# EAGLE board SHiB64(Mk.1Mod.2) (EAGLE 9.6.0)
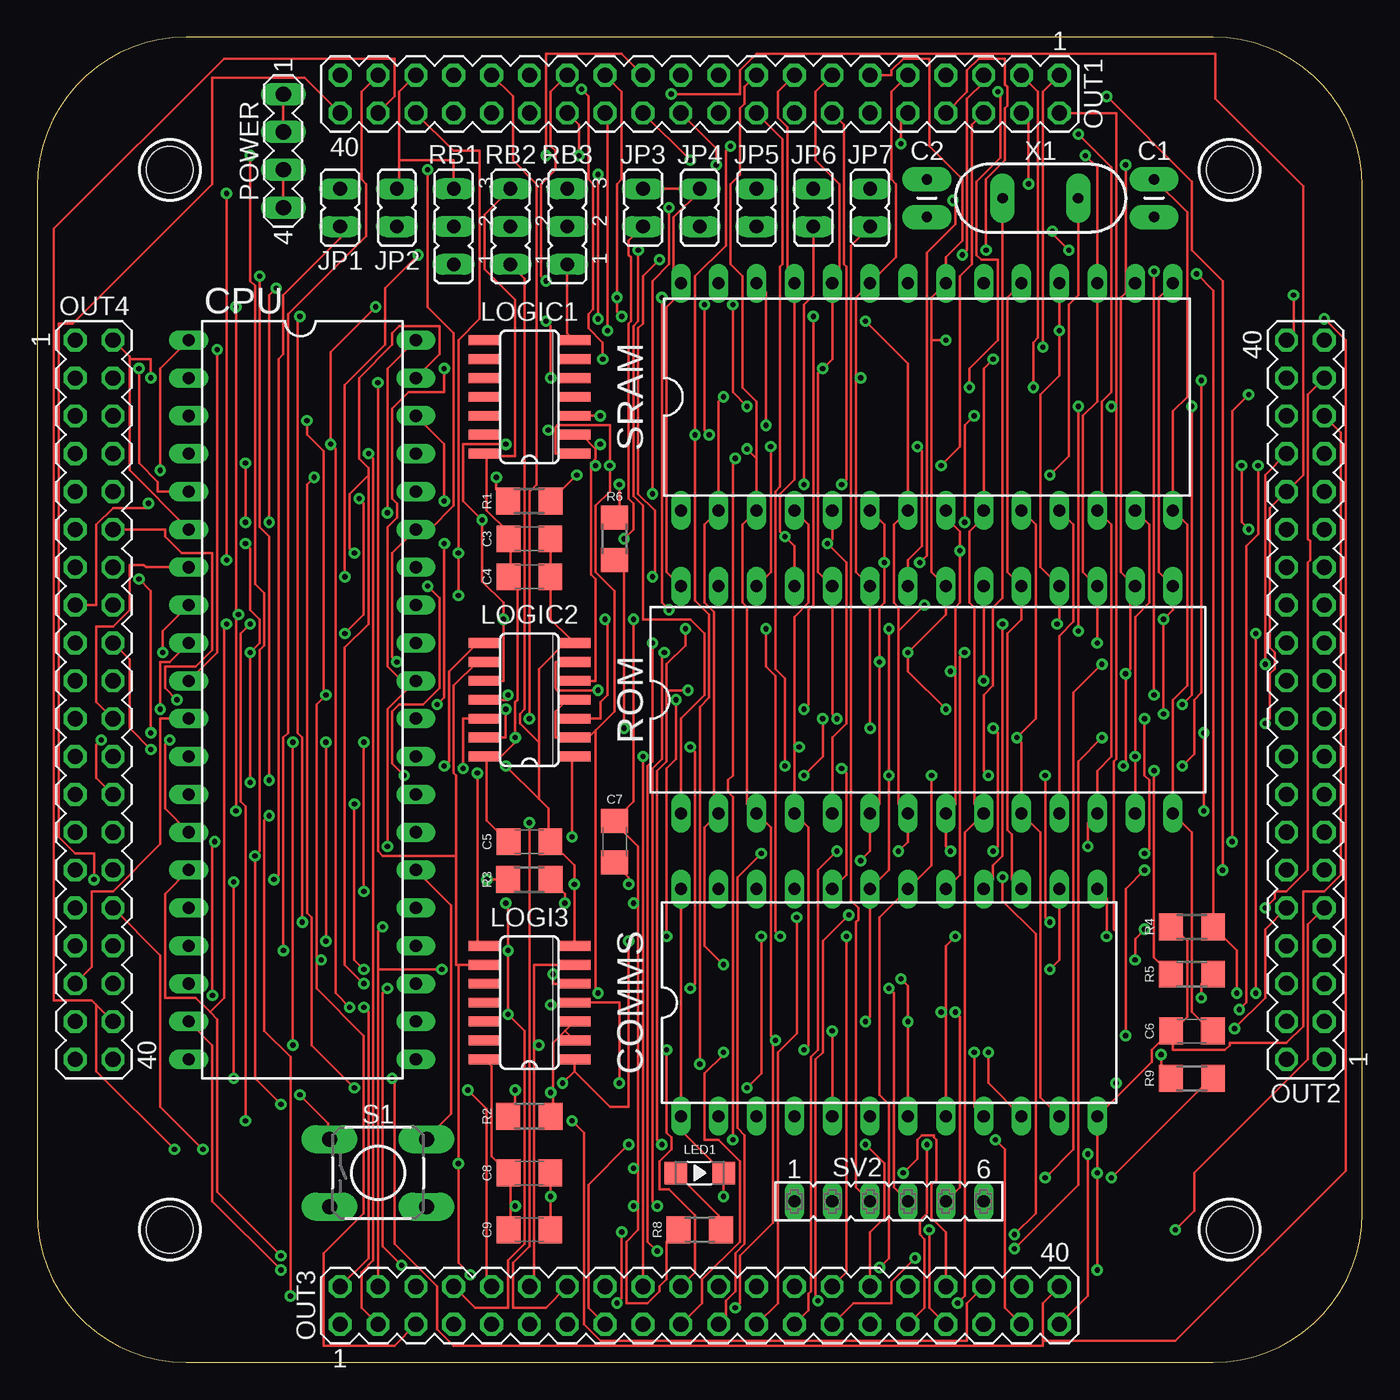
[diagram p0: board, top side]
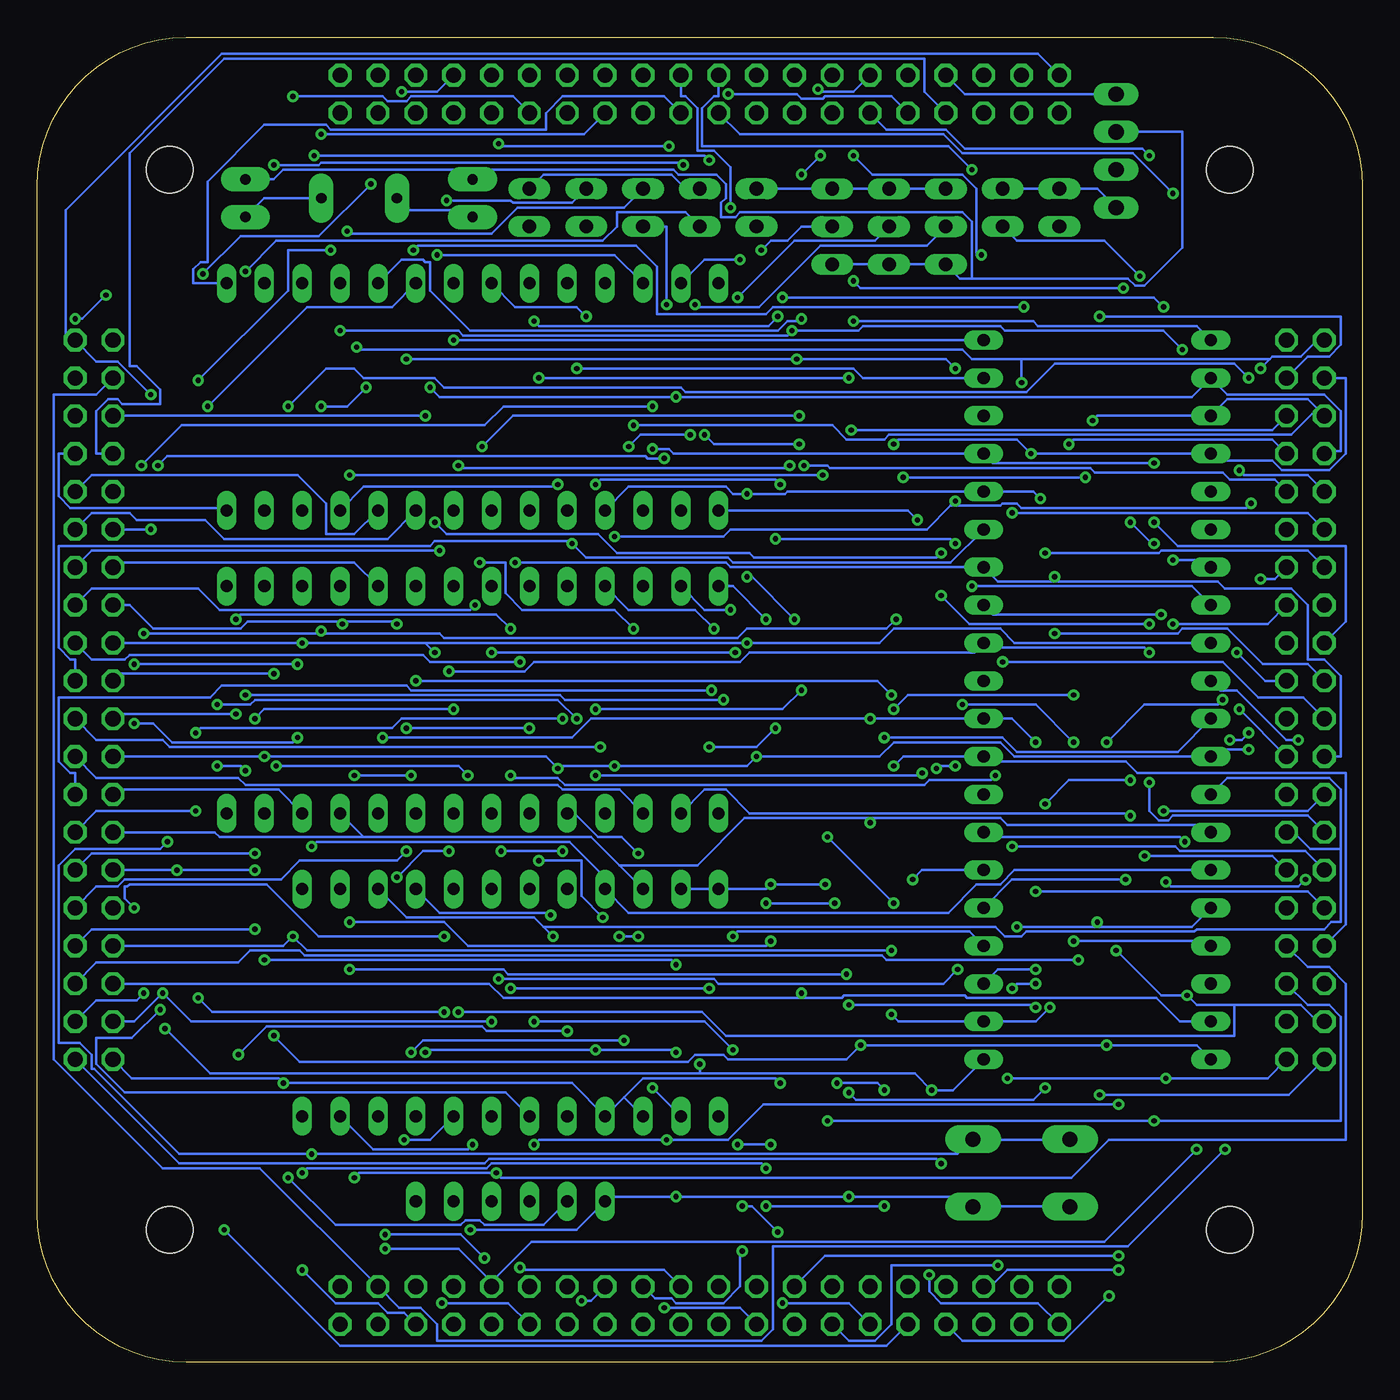
[diagram p1: board, bottom side, seen from below]

Size 88.9 x 88.9 mm. Coordinates in mm from the lower left corner, seen from the top.
Outline: 0,78.9 0,10 arc90 10,0 78.9,0 arc90 88.9,10 88.9,78.9 arc90 78.9,88.9 10,88.9 arc90 0,78.9
Copper layers (1*16): Top 0.035mm / dielectric 1.5mm / Bottom 0.035mm
Design rules "default": minimum track width 6mil, minimum drill 0.35mm, track to track 6mil, track to pad 6mil, pad to pad 6mil, via to via 6mil, smd to smd 6mil, copper to edge 40mil, drill to drill 6mil, minimum pad ring 10mil, minimum via ring 8mil, stop-mask expansion 4mil, vias tented up to drill 0mil, thermal gap 10mil

## Footprints (pad centres in the part's own frame; a part is rotated, then mirrored left to right if it is on the bottom)
CAP-PTH-2.54 = drill 0.7 pad 1.651 long: 1 -1.27,0; 2 1.27,0
C1206 = smd 1.6 x 1.8: 1 -1.4,0; 2 1.4,0
DIL24 = drill 0.813 long: 1 -13.97,-7.62; 2 -11.43,-7.62; 3 -8.89,-7.62; 4 -6.35,-7.62; 5 -3.81,-7.62; 6 -1.27,-7.62; 7 1.27,-7.62; 8 3.81,-7.62; 9 6.35,-7.62; 10 8.89,-7.62; 11 11.43,-7.62; 12 13.97,-7.62; 13 13.97,7.62; 14 11.43,7.62; 15 8.89,7.62; 16 6.35,7.62; 17 3.81,7.62; 18 1.27,7.62; 19 -1.27,7.62; 20 -3.81,7.62; 21 -6.35,7.62; 22 -8.89,7.62; 23 -11.43,7.62; 24 -13.97,7.62
DIL40 = drill 0.813 long: 1 -24.13,-7.62; 2 -21.59,-7.62; 3 -19.05,-7.62; 4 -16.51,-7.62; 5 -13.97,-7.62; 6 -11.43,-7.62; 7 -8.89,-7.62; 8 -6.35,-7.62; 9 -3.81,-7.62; 10 -1.27,-7.62; 11 1.27,-7.62; 12 3.81,-7.62; 13 6.35,-7.62; 14 8.89,-7.62; 15 11.43,-7.62; 16 13.97,-7.62; 17 16.51,-7.62; 18 19.05,-7.62; 19 21.59,-7.62; 20 24.13,-7.62; 21 24.13,7.62; 22 21.59,7.62; 23 19.05,7.62; 24 16.51,7.62; 25 13.97,7.62; 26 11.43,7.62; 27 8.89,7.62; 28 6.35,7.62; 29 3.81,7.62; 30 1.27,7.62; 31 -1.27,7.62; 32 -3.81,7.62; 33 -6.35,7.62; 34 -8.89,7.62; 35 -11.43,7.62; 36 -13.97,7.62; 37 -16.51,7.62; 38 -19.05,7.62; 39 -21.59,7.62; 40 -24.13,7.62
JP1 = drill 0.914 long: 1 0,-1.27; 2 0,1.27
LED_1206 = smd 1.5 x 1.5: + -1.6,0; - 1.6,0
SO14 = smd 0.66 x 2.032: 1 -3.81,-3.073; 2 -2.54,-3.073; 3 -1.27,-3.073; 4 0,-3.073; 5 1.27,-3.073; 6 2.54,-3.073; 7 3.81,-3.073; 8 3.81,3.073; 9 2.54,3.073; 10 1.27,3.073; 11 0,3.073; 12 -1.27,3.073; 13 -2.54,3.073; 14 -3.81,3.073
MA20-2 = drill 1.016 octagon: 1 -24.13,-1.27; 2 -24.13,1.27; 3 -21.59,-1.27; 4 -21.59,1.27; 5 -19.05,-1.27; 6 -19.05,1.27; 7 -16.51,-1.27; 8 -16.51,1.27; 9 -13.97,-1.27; 10 -13.97,1.27; 11 -11.43,-1.27; 12 -11.43,1.27; 13 -8.89,-1.27; 14 -8.89,1.27; 15 -6.35,-1.27; 16 -6.35,1.27; 17 -3.81,-1.27; 18 -3.81,1.27; 19 -1.27,-1.27; 20 -1.27,1.27; 21 1.27,-1.27; 22 1.27,1.27; 23 3.81,-1.27; 24 3.81,1.27; 25 6.35,-1.27; 26 6.35,1.27; 27 8.89,-1.27; 28 8.89,1.27; 29 11.43,-1.27; 30 11.43,1.27; 31 13.97,-1.27; 32 13.97,1.27; 33 16.51,-1.27; 34 16.51,1.27; 35 19.05,-1.27; 36 19.05,1.27; 37 21.59,-1.27; 38 21.59,1.27; 39 24.13,-1.27; 40 24.13,1.27
MA04-1 = drill 1.016 long: 1 -3.81,0; 2 -1.27,0; 3 1.27,0; 4 3.81,0
R1206 = smd 1.6 x 1.803: 1 -1.422,0; 2 1.422,0
JP2 = drill 0.914 long: 1 -2.54,0; 2 0,0; 3 2.54,0
DIL28-6 = drill 0.813 long: 1 -16.51,-7.62; 2 -13.97,-7.62; 3 -11.43,-7.62; 4 -8.89,-7.62; 5 -6.35,-7.62; 6 -3.81,-7.62; 7 -1.27,-7.62; 8 1.27,-7.62; 9 3.81,-7.62; 10 6.35,-7.62; 11 8.89,-7.62; 12 11.43,-7.62; 13 13.97,-7.62; 14 16.51,-7.62; 15 16.51,7.62; 16 13.97,7.62; 17 11.43,7.62; 18 8.89,7.62; 19 6.35,7.62; 20 3.81,7.62; 21 1.27,7.62; 22 -1.27,7.62; 23 -3.81,7.62; 24 -6.35,7.62; 25 -8.89,7.62; 26 -11.43,7.62; 27 -13.97,7.62; 28 -16.51,7.62
TACTILE_SWITCH_PTH_6.0MM = drill 1.016 pad 1.88 long: 1 -3.251,2.261; 2 3.251,2.261; 3 -3.251,-2.261; 4 3.251,-2.261
FE06 = drill 0.813 long: 1 -6.35,0; 2 -3.81,0; 3 -1.27,0; 4 1.27,0; 5 3.81,0; 6 6.35,0
MOUNTINGHOLE_3.2MM_PLATEDTHIN = hole 3.1: 0,0
HC49US = drill 0.7 pad 1.651 long: 1 -2.54,0; 2 2.54,0

## Placement (x,y rotation side)
C1  22pF  [CAP-PTH-2.54]  74.93,78.11 90 top
C2  22pF  [CAP-PTH-2.54]  59.69,78.11 90 top
C3  100nF  [C1206]  33.02,55.24 0 top
C4  100nF  [C1206]  33.02,52.7 0 top
C5  100nF  [C1206]  33.02,34.92 0 top
C6  100nF  [C1206]  77.47,22.23 0 top
C7  100nF  [C1206]  38.73,34.92 270 top
C8  100nF  [C1206]  33.02,12.7 0 top
C9  100uF  [C1206]  33.02,8.89 0 top
COMMS  [DIL24]  57.15,24.13 0 top
CPU  Z80  [DIL40]  17.78,44.45 270 top
JP1  [JP1]  20.32,77.47 0 top
JP2  [JP1]  24.13,77.47 0 top
JP3  [JP1]  40.64,77.47 0 top
JP4  [JP1]  44.45,77.47 0 top
JP5  [JP1]  48.26,77.47 0 top
JP6  [JP1]  52.07,77.47 0 top
JP7  [JP1]  55.88,77.47 0 top
LED1  Red  [LED_1206]  44.45,12.7 0 top
LOGI3  74LS04  [SO14]  33.02,24.13 90 top
LOGIC1  74LS32  [SO14]  33.02,64.77 90 top
LOGIC2  74LS32  [SO14]  33.02,44.45 90 top
OUT1  [MA20-2]  44.45,85.09 180 top
OUT2  [MA20-2]  85.09,44.45 90 top
OUT3  [MA20-2]  44.45,3.81 0 top
OUT4  [MA20-2]  3.81,44.45 270 top
POWER  [MA04-1]  16.51,81.28 270 top
R1  1kΩ  [R1206]  33.02,57.78 0 top
R2  1MΩ  [R1206]  33.02,16.51 0 top
R3  2.2kΩ  [R1206]  33.02,32.38 0 top
R4  1MΩ  [R1206]  77.47,29.21 0 top
R5  1MΩ  [R1206]  77.47,26.04 0 top
R6  1MΩ  [R1206]  38.73,55.24 270 top
R8  330Ω  [R1206]  44.45,8.89 0 top
R9  1MΩ  [R1206]  77.47,19.05 0 top
RB1  [JP2]  27.94,76.2 90 top
RB2  [JP2]  31.75,76.2 90 top
RB3  [JP2]  35.56,76.2 90 top
ROM  27C512AP  [DIL28-6]  59.69,44.45 0 top
S1  [TACTILE_SWITCH_PTH_6.0MM]  22.86,12.7 0 top
SRAM  [DIL28-6]  59.69,64.77 0 top
SV2  [FE06]  57.15,10.79 0 top
U$1  MOUNTING_HOLE  [MOUNTINGHOLE_3.2MM_PLATEDTHIN]  8.89,8.89 0 top
U$2  MOUNTING_HOLE  [MOUNTINGHOLE_3.2MM_PLATEDTHIN]  80.01,8.89 0 top
U$3  MOUNTING_HOLE  [MOUNTINGHOLE_3.2MM_PLATEDTHIN]  80.01,80.01 0 top
U$4  MOUNTING_HOLE  [MOUNTINGHOLE_3.2MM_PLATEDTHIN]  8.89,80.01 0 top
X1  7.3728 MHz  [HC49US]  67.31,78.11 0 top

## Library data of the parts
C1 C2 S1 U$1-U$4 X1 = ACES_THT
C3-C9 LED1 R1-R6 R8 R9 = ACES_SMT
COMMS = micro-motorola; MF: NTE ELECTRONICS; MPN: NTE6850; OC_FARNELL: 4899775; OC_NEWARK: 31C2457
CPU = zilog
JP1-JP7 RB1-RB3 = jumper
LOGI3 LOGIC1 LOGIC2 = 74xx-us
OUT1-OUT4 POWER = con-lstb; OC_FARNELL: unknown; OC_NEWARK: unknown
ROM = microchip; MPN: M27C512-90B6; OC_FARNELL: 1642690; OC_NEWARK: 20M6389
SRAM = memory-hitachi
SV2 = con-lsta; OC_FARNELL: unknown; OC_NEWARK: unknown

## Nets
+5V: C3.1 C4.1 C5.1 C6.1 C7.1 C8.1 C9.1 COMMS.12 CPU.11 JP1.2 JP2.2 JP3.2 JP4.2 JP7.2 LOGI3.14 LOGIC1.14 LOGIC2.14 OUT1.35 OUT2.35 OUT3.35 OUT4.35 POWER.3 POWER.4 R3.2 R4.1 R8.1 RB1.3 RB2.3 RB3.3 ROM.28 SRAM.28
A0: COMMS.11 CPU.30 OUT1.31 OUT2.31 OUT3.31 OUT4.31 ROM.10 SRAM.10
A1: CPU.31 OUT1.29 OUT2.29 OUT3.29 OUT4.29 ROM.9 SRAM.9
A2: CPU.32 OUT1.27 OUT2.27 OUT3.27 OUT4.27 ROM.8 SRAM.8
A3: CPU.33 OUT1.25 OUT2.25 OUT3.25 OUT4.25 ROM.7 SRAM.7
A4: CPU.34 OUT1.23 OUT2.23 OUT3.23 OUT4.23 ROM.6 SRAM.6
A5: CPU.35 OUT1.21 OUT2.21 OUT3.21 OUT4.21 ROM.5 SRAM.5
A6: COMMS.9 CPU.36 OUT1.19 OUT2.19 OUT3.19 OUT4.19 ROM.4 SRAM.4
A7: COMMS.10 CPU.37 OUT1.17 OUT2.17 OUT3.17 OUT4.17 ROM.3 SRAM.3
A8: CPU.38 OUT1.15 OUT2.15 OUT3.15 OUT4.15 ROM.25 SRAM.25
A9: CPU.39 OUT1.13 OUT2.13 OUT3.13 OUT4.13 ROM.24 SRAM.24
A10: CPU.40 OUT1.11 OUT2.11 OUT3.11 OUT4.11 ROM.21 SRAM.21
A11: CPU.1 OUT1.9 OUT2.9 OUT3.9 OUT4.9 ROM.23 SRAM.23
A12: CPU.2 OUT1.7 OUT2.7 OUT3.7 OUT4.7 ROM.2 SRAM.2
A13: CPU.3 LOGIC2.13 OUT1.5 OUT2.5 OUT3.5 OUT4.5 SRAM.26
A14: CPU.4 LOGIC2.10 OUT1.3 OUT2.3 OUT3.3 OUT4.3 SRAM.1
A15: CPU.5 LOGI3.9 LOGIC2.9 OUT1.1 OUT2.1 OUT3.1 OUT4.1
CLK: COMMS.3 COMMS.4 CPU.6 LOGI3.4 OUT1.2 OUT2.2 OUT3.2 OUT4.2
D0: COMMS.22 CPU.14 OUT1.14 OUT2.14 OUT3.14 OUT4.14 ROM.11 SRAM.11
D1: COMMS.21 CPU.15 OUT1.16 OUT2.16 OUT3.16 OUT4.16 ROM.12 SRAM.12
D2: COMMS.20 CPU.12 OUT1.18 OUT2.18 OUT3.18 OUT4.18 ROM.13 SRAM.13
D3: COMMS.19 CPU.8 OUT1.20 OUT2.20 OUT3.20 OUT4.20 ROM.15 SRAM.15
D4: COMMS.18 CPU.7 OUT1.22 OUT2.22 OUT3.22 OUT4.22 ROM.16 SRAM.16
D5: COMMS.17 CPU.9 OUT1.24 OUT2.24 OUT3.24 OUT4.24 ROM.17 SRAM.17
D6: COMMS.16 CPU.10 OUT1.26 OUT2.26 OUT3.26 OUT4.26 ROM.18 SRAM.18
D7: COMMS.15 CPU.13 OUT1.28 OUT2.28 OUT3.28 OUT4.28 ROM.19 SRAM.19
GND: C1.2 C2.2 C3.2 C4.2 C5.2 C6.2 C7.2 C8.2 C9.2 COMMS.1 COMMS.23 COMMS.24 CPU.29 LED1.- LOGI3.7 LOGIC1.7 LOGIC2.7 OUT1.33 OUT2.33 OUT3.33 OUT4.33 POWER.1 POWER.2 RB1.1 RB2.1 RB3.1 ROM.14 S1.3 S1.4 SRAM.14 SV2.1
HALT: CPU.18
INT: COMMS.7 CPU.16 OUT1.4 OUT2.4 OUT3.4 OUT4.4 R4.2
IORQ: CPU.20 LOGI3.6 OUT1.12 OUT2.12 OUT3.12 OUT4.12
M1: COMMS.8 CPU.27 OUT1.37 OUT2.37 OUT3.37 OUT4.37
MREQ: CPU.19 LOGIC1.1 LOGIC2.2 LOGIC2.4 OUT1.6 OUT2.6 OUT3.6 OUT4.6
N$1: C1.1 R1.2 X1.2
N$2: C2.1 LOGI3.1 R2.1 X1.1
N$3: LOGI3.2 LOGI3.3 R1.1 R2.2
N$4: CPU.25 JP1.1
N$5: CPU.23 JP2.1
N$6: CPU.17 JP3.1
N$7: CPU.24 JP4.1
N$8: LOGIC1.3 ROM.22
N$9: LOGIC2.11 ROM.20
N$10: LOGIC2.8 LOGIC2.12
N$11: JP5.2 R5.1
N$12: COMMS.14 LOGI3.5
N$13: JP6.1 R6.1
N$14: COMMS.6 JP5.1
N$15: R6.2 SV2.4
N$16: R5.2 SV2.5
N$17: COMMS.2 JP6.2
N$18: COMMS.5 R9.1
N$19: JP7.1 SV2.3
N$20: R9.2 SV2.2
N$21: LOGI3.8 SRAM.20
N$22: LOGIC2.6 SRAM.22
N$23: LOGIC2.3 SRAM.27
N$26: LED1.+ R8.2
RD: CPU.21 LOGIC1.2 LOGIC2.5 OUT1.10 OUT2.10 OUT3.10 OUT4.10
RESET: CPU.26 OUT1.39 OUT2.39 OUT3.39 OUT4.39 R3.1 S1.1 S1.2
RFSH: CPU.28
RX: OUT1.32 OUT2.32 OUT3.32 OUT4.32
S1: RB1.2 ROM.26
S2: RB2.2 ROM.27
S3: RB3.2 ROM.1
SPR1: OUT1.34 OUT2.34 OUT3.34 OUT4.34
SPR2: OUT1.36 OUT2.36 OUT3.36 OUT4.36
SPR3: OUT1.38 OUT2.38 OUT3.38 OUT4.38
SPR4: OUT1.40 OUT2.40 OUT3.40 OUT4.40
TX: OUT1.30 OUT2.30 OUT3.30 OUT4.30
WR: COMMS.13 CPU.22 LOGIC2.1 OUT1.8 OUT2.8 OUT3.8 OUT4.8

## Tracks (layer width: path | path; a pad name or v marks a point on that pad's centre or on a via)
+5V  (via drill 0.35)
  Top 0.152: 76.2,22.23 77.15,23.18 77.15,28.26 76.2,29.21 R4.1 | v71.12,6.19 v71.12,12.7 COMMS.12 74.77,20.16 74.77,20.95 76.04,22.23 C6.1 76.2,22.23 | OUT2.35 87.47,62.39 87.47,32.7 86.36,31.59 84.93,31.59 84.93,22.54 83.82,21.43 80.01,21.43 80.01,21.27 79.69,20.95 76.2,20.95 76.2,22.23 | 31.75,10.48 31.75,12.7 C8.1 31.59,12.7 30.48,13.81 30.48,19.84 30,20.32 LOGI3.14 | 31.75,10.48 31.75,8.89 C9.1 | v40.01,49.85 40.01,37.62 38.73,36.35 C7.1 38.73,36.2 40.32,34.61 40.32,30.8 | 40.32,30.8 40.32,13.02 | 40.32,13.02 40.32,10.48 | 40.32,10.48 40.32,8.89 39.53,8.1 39.53,3.97 40.96,3.97 41.75,4.76 41.75,5.08 42.23,5.56 42.23,8.1 R8.1 | v35.4,30.8 35.4,31.43 R3.2 | 40.32,30.8 v40.01,30.8 | v32.07,10.48 31.75,10.48 | 40.32,10.48 v40.01,10.48 | CPU.11 8.26,43.18 8.26,34.77 5.08,31.59 3.65,31.59 3.65,26.51 OUT4.35 | 30.16,40.48 30.16,36.35 31.59,34.92 C5.1 | 30.16,40.48 30,40.64 LOGIC2.14 30.16,40.48 | 31.75,52.7 31.75,55.24 C3.1 31.59,55.24 31.59,55.72 30.16,57.15 30.16,60.8 | 30.16,60.8 30,60.96 LOGIC1.14 30.16,60.8 | 30.16,40.48 30.96,40.48 32.07,41.59 v32.07,41.91 32.07,44.29 32.23,44.45 32.23,52.23 31.75,52.7 | 31.75,52.7 C4.1 | POWER.3 POWER.4 | OUT1.35 24.29,85.25 24.29,80.64 | 24.29,80.64 24.29,78.9 JP2.2 | JP3.2 JP4.2 44.45,78.58 42.7,76.83 42.7,72.87 SRAM.28 43.18,71.75 42.23,70.8 42.23,53.02 ROM.28 | 24.29,80.64 27.94,80.64 RB1.3 | 30.16,60.8 32.07,60.8 32.07,71.28 30,73.34 30,76.99 RB2.3 | 40.32,13.02 v40.01,13.02
  Bottom 0.152: OUT3.35 64.29,3.33 65.41,3.33 66.04,3.97 68.9,3.97 v71.12,6.19 | v40.01,49.85 42.23,52.07 ROM.28 | v40.01,30.8 v35.4,30.8 | v40.01,10.48 v32.07,10.48 | JP2.2 JP1.2 17.78,78.74 POWER.4 | RB1.3 RB2.3 RB3.3 JP3.2 | JP7.2 54.93,79.69 46.35,79.69 45.4,78.74 JP4.2 | CPU.11 12.38,40.96 23.18,40.96 24.13,41.91 v32.07,41.91 | v71.12,12.7 70.8,13.02 58.74,13.02 58.42,13.34 40.32,13.34 v40.01,13.02
A0  (via drill 0.35)
  Top 0.152: SRAM.10 66.99,56.2 66.99,43.18 v65.72,41.91 66.04,41.59 ROM.10 67.31,35.56 67.31,17.78 COMMS.11 | v21.91,41.59 v21.91,31.59 | OUT1.31 31.91,84.93 31.91,80.64 33.5,79.06 33.5,58.9 33.02,58.42 v33.02,43.18 | OUT3.31 59.53,3.65 59.53,8.26 59.21,8.57 59.21,9.53 59.69,10 v59.69,14.61
  Bottom 0.152: v65.72,41.91 53.02,41.91 51.75,43.18 v33.02,43.18 CPU.30 23.5,43.18 v21.91,41.59 | OUT4.31 3.65,31.59 v21.91,31.59 | v59.69,14.61 60.01,14.29 66.36,14.29 COMMS.11 | OUT2.31 85.25,59.53 71.44,59.53 69.53,57.63 69.53,55.56 67.63,55.56 SRAM.10
A1  (via drill 0.35)
  Top 0.152: 24.92,45.24 23.5,43.81 v23.5,34.61 | v61.75,3.97 62.23,4.45 62.23,35.56 ROM.9 62.87,37.47 62.87,50.64 62.55,50.96 62.55,55.72 63.5,56.67 SRAM.9 63.5,66.67 v64.14,67.31 | v36.51,85.41 36.99,84.93 36.99,79.38 37.31,79.06 37.31,70.64 36.99,70.33 36.99,69.37 37.94,68.42 v37.94,67.31 | 24.92,45.24 23.5,46.67 23.5,56.04 24.13,56.67 24.13,57.63 23.81,57.94 23.81,63.98 24.92,65.09 27.3,65.09 v27.3,66.67 | 24.92,45.24 CPU.31
  Bottom 0.152: v23.5,34.61 12.54,34.61 12.22,34.29 3.81,34.29 OUT4.29 | OUT3.29 57.31,3.97 v61.75,3.97 | OUT1.29 34.13,85.25 36.35,85.25 v36.51,85.41 | v64.14,67.31 v37.94,67.31 27.94,67.31 v27.3,66.67 | OUT2.29 85.25,56.99 82.71,56.99 82.23,56.52 77.63,56.52 76.36,55.24 65.41,55.24 SRAM.9
A2  (via drill 0.35)
  Top 0.152: 61.59,46.35 61.59,50.64 61.91,50.96 v61.91,54.45 61.91,55.72 60.96,56.67 SRAM.8 | 61.59,46.35 61.59,37.47 ROM.8 60.96,34.61 v61.28,34.29 | 61.59,46.35 v61.28,46.35 | OUT3.27 54.77,3.97 57.31,3.97 57.31,5.4 v58.9,6.99 | v65.56,8.57 66.99,10 66.99,28.73 64.77,30.96 v64.77,32.54 | v14.29,38.89 v14.29,47.62 14.92,48.26 14.92,49.85 14.29,50.48 14.29,54.61 v13.97,54.93 | OUT1.27 34.45,85.25 34.45,81.6 34.77,81.28 34.77,80.01 33.81,79.06 33.81,72.87 v34.13,72.55 | v16.03,72.07 15.56,71.6 v15.56,56.36
  Bottom 0.152: 25.72,47.94 26.04,47.62 41.12,47.62 41.75,46.99 55.56,46.99 56.2,46.35 v61.28,46.35 | v58.9,6.99 60.48,8.57 v65.56,8.57 | v64.77,32.54 63.02,34.29 v61.28,34.29 | OUT4.27 3.65,36.67 12.7,36.67 13.02,36.35 13.65,36.35 14.29,36.99 v14.29,38.89 | v14.29,47.62 14.61,47.94 25.72,47.94 | 25.72,47.94 CPU.32 | OUT2.27 85.25,54.45 v61.91,54.45 | v34.13,72.55 33.66,72.07 v16.03,72.07 | v15.56,56.36 14.13,54.93 v13.97,54.93
A3  (via drill 0.35)
  Top 0.152: v13.34,36.99 13.34,50.01 v13.49,50.16 13.34,50.32 v13.34,70.8 | 57.78,49.05 57.78,50.64 57.47,50.96 57.47,56.2 SRAM.7 58.42,66.99 v55.56,69.85 | 57.78,49.05 57.78,37.47 ROM.7 58.42,34.92 v57.78,34.29 | OUT3.25 51.75,3.49 51.75,4.6 51.91,4.76 51.91,20.48 52.39,20.95 52.39,33.02 v53.66,34.29 | 57.78,49.05 v59.53,50.8 | OUT1.25 39.21,85.25 39.21,79.38 38.89,79.06 v38.89,71.44 38.89,70.48 v39.21,70.17
  Bottom 0.152: CPU.33 24.77,50.16 v13.49,50.16 | v13.34,36.99 3.65,36.99 OUT4.25 | v57.78,34.29 v53.66,34.29 | OUT2.25 85.25,51.91 78.11,51.91 76.68,50.48 59.85,50.48 v59.53,50.8 | v39.21,70.17 39.85,69.53 55.24,69.53 v55.56,69.85 | v13.34,70.8 13.97,71.44 v38.89,71.44
A4  (via drill 0.35)
  Top 0.152: OUT1.23 39.21,87.79 34.13,87.79 v34.13,80.96 | v25.56,74.3 23.34,72.07 23.34,68.26 20.64,65.56 v20.64,52.7 | SRAM.6 56.83,56.2 v56.83,53.66 56.83,50.96 56.52,50.64 v56.52,46.99 56.52,37.47 ROM.6 55.88,34.29 v55.24,33.66 | OUT3.23 49.69,3.97 49.69,20.8 50.96,22.07 v50.96,29.84
  Bottom 0.152: 20.64,52.39 9.68,52.39 9.21,51.91 4.76,51.91 3.65,50.8 3.65,47.15 2.54,47.15 1.43,46.04 1.43,40.64 OUT4.23 | 20.64,52.39 24.45,52.39 CPU.34 42.39,53.34 42.7,53.66 v56.83,53.66 | v34.13,80.96 32.86,79.69 26.83,79.69 25.88,78.74 25.88,74.3 v25.56,74.3 | 20.64,52.39 v20.64,52.7 | v50.96,29.84 52.39,31.27 52.39,33.66 v55.24,33.66 | OUT2.23 85.25,47.15 83.03,47.15 82.71,47.47 63.02,47.47 62.55,46.99 v56.52,46.99
A5  (via drill 0.35)
  Top 0.152: SRAM.5 53.34,55.24 v53.02,54.93 54.29,53.66 54.29,42.86 53.34,41.91 ROM.5 | v24.13,46.99 23.81,47.31 23.81,54.29 CPU.35 26.35,55.88 27.94,57.47 27.94,69.06 26.19,70.8 v26.19,80.01 | OUT3.21 46.2,3.02 46.2,4.13 46.83,4.76 46.83,7.3 47.47,7.94 47.47,15.24 46.99,15.72 46.99,32.54 v48.58,34.13
  Bottom 0.152: CPU.35 27.62,53.66 42.23,53.66 42.55,53.98 52.07,53.98 v53.02,54.93 53.18,55.09 62.23,55.09 62.55,54.77 87.47,54.77 87.47,47.94 86.68,47.15 86.36,47.15 OUT2.21 | OUT4.21 3.97,44.61 6.99,44.61 9.37,46.99 v24.13,46.99 | v48.58,34.13 49.69,35.24 51.28,35.24 52.86,36.83 ROM.5 | OUT1.21 43.18,84.93 43.5,84.93 44.29,84.14 44.29,81.6 27.78,81.6 v26.19,80.01
A6  (via drill 0.35)
  Top 0.152: 50.8,41.27 50.8,50.01 51.75,50.96 51.75,56.2 SRAM.4 | 50.8,41.27 ROM.4 51.75,35.88 51.75,21.27 v51.44,20.95 | COMMS.9 62.87,17.14 v62.87,20.8 | OUT3.19 44.61,3.97 44.61,5.56 47.15,8.1 47.15,13.49 45.72,14.92 44.77,14.92 44.77,19.37 46.04,20.64 v46.04,20.8 | v20.64,48.9 21.91,50.16 21.91,57.63 v21.59,57.94 | 50.8,41.27 v51.12,41.27 | v42.39,77.47 42.39,73.66 41.27,72.55 v41.27,58.26
  Bottom 0.152: v62.87,20.8 62.71,20.95 v51.44,20.95 46.2,20.95 v46.04,20.8 | SRAM.4 49.21,58.74 42.7,58.74 42.23,58.26 v41.27,58.26 38.73,58.26 38.58,58.42 CPU.36 22.07,58.42 v21.59,57.94 | OUT4.19 3.65,46.83 6.67,46.83 9.05,49.21 12.06,49.21 12.38,48.9 v20.64,48.9 | OUT2.19 84.93,41.75 80.49,41.75 80.01,41.27 v51.12,41.27 | OUT1.19 45.72,84.93 45.4,84.93 44.61,84.14 44.61,81.28 43.5,81.28 42.39,80.17 v42.39,77.47
A7  (via drill 0.35)
  Top 0.152: COMMS.10 63.82,18.73 v63.82,20.8 | 49.37,21.75 49.21,21.91 49.21,35.88 ROM.3 47.62,37.47 47.62,50.64 47.31,50.96 47.31,56.2 SRAM.3 48.26,60.64 | 48.26,60.64 v47.62,61.28 | v46.83,3.65 47.15,3.97 47.15,7.14 49.37,9.37 49.37,21.75 | 49.37,21.75 v49.53,21.59 | v13.97,60.33 v13.97,56.36 | OUT1.17 47.47,85.57 47.47,84.45 47.15,84.14 47.15,79.69 46.51,79.06 46.51,73.66 47.31,72.87 47.31,65.41 48.26,64.45 48.26,60.64
  Bottom 0.152: v63.82,20.8 63.02,21.59 v49.53,21.59 | v47.62,61.28 46.51,61.28 46.2,60.96 CPU.37 24.77,60.33 v13.97,60.33 | OUT3.17 41.75,3.65 v46.83,3.65 | OUT4.17 1.11,49.69 1.11,54.77 12.38,54.77 v13.97,56.36 | OUT2.17 84.93,39.21 75.41,39.21 74.93,38.73 53.98,38.73 53.66,38.42 49.85,38.42 ROM.3
A8  (via drill 0.35)
  Top 0.152: OUT1.15 49.69,85.25 49.69,83.5 50.32,82.87 50.32,72.87 SRAM.25 50.8,59.21 49.85,58.26 49.85,55.72 v50.16,55.4 50.8,54.77 ROM.25 | CPU.38 27.3,61.59 v27.3,57.78 | OUT3.15 36.99,3.65 36.99,11.91 v39.69,14.61 | v41.91,14.61 41.59,14.92 41.59,39.69 42.23,40.32 42.23,45.09 | 42.23,45.09 42.23,46.83 43.5,48.1 v43.5,49.21 | OUT4.15 3.97,50.8 3.97,56.2 5.08,57.31 7.46,57.31 v7.46,57.63 | 42.23,45.09 v43.66,45.09
  Bottom 0.152: 27.62,57.47 29.21,55.88 42.39,55.88 42.86,55.4 v50.16,55.4 | 27.62,57.47 v27.3,57.78 | v41.91,14.61 v39.69,14.61 | v43.5,49.21 44.77,50.48 49.21,50.48 ROM.25 | v7.46,57.63 7.78,57.31 22.86,57.31 23.18,57.63 24.13,57.63 24.29,57.47 27.62,57.47 | OUT2.15 86.36,39.53 86.68,39.53 87.47,40.32 87.47,44.61 77.31,44.61 76.52,45.4 64.14,45.4 63.82,45.09 v43.66,45.09
A9  (via drill 0.35)
  Top 0.152: v24.45,6.51 23.18,7.78 23.18,24.77 v23.5,25.08 | v21.91,25.4 20.64,26.67 20.64,47.94 22.23,49.53 22.23,59.53 | 22.23,59.53 22.23,60.01 21.59,60.64 21.59,66.04 23.81,68.26 23.81,69.06 24.29,69.53 26.99,69.53 26.99,67.63 CPU.39 | v21.27,54.29 20.95,54.61 20.95,58.26 22.23,59.53 | OUT1.13 52.23,85.25 52.23,80.64 53.82,79.06 53.82,72.87 SRAM.24 53.34,67.31 v52.7,66.67 52.39,66.36 52.39,53.02 ROM.24 53.34,43.5 v53.66,43.18 | v78.26,42.23 v78.26,36.99
  Bottom 0.152: CPU.39 33.5,66.04 34.13,66.67 v52.7,66.67 | OUT3.13 34.45,1.43 32.7,1.43 31.59,2.54 31.59,6.51 v24.45,6.51 | v23.5,25.08 23.18,25.4 v21.91,25.4 | OUT4.13 3.65,54.45 13.49,54.45 13.65,54.29 v21.27,54.29 | OUT2.13 84.93,36.99 v78.26,36.99 | v78.26,42.23 77.95,42.55 65.09,42.55 64.45,43.18 v53.66,43.18
A10  (via drill 0.35)
  Top 0.152: CPU.40 23.5,66.67 v23.5,56.99 | 60.01,68.58 60.01,71.44 SRAM.21 60.96,74.14 62.07,75.25 62.07,79.38 59.85,81.6 59.85,87.47 58.1,87.47 57.31,86.68 57.31,86.36 OUT1.11 | 60.01,68.58 60.01,53.02 ROM.21 60.96,50.16 v58.42,47.62 58.42,46.35 v60.96,43.81 | v38.89,3.97 39.21,4.29 v39.21,8.73 | v41.59,10.48 41.27,10.79 41.27,39.85 41.91,40.48 41.91,47.47 v42.07,47.62 | v74.3,34.13 74.61,34.45 74.61,39.05 74.3,39.37 v74.3,43.18 | 60.01,68.58 v60.96,68.58
  Bottom 0.152: v23.5,56.99 3.65,56.99 OUT4.11 | OUT3.11 34.45,3.97 v38.89,3.97 | v39.21,8.73 40.96,10.48 v41.59,10.48 | v58.42,47.62 v42.07,47.62 | OUT2.11 85.25,34.13 v74.3,34.13 | v74.3,43.18 73.66,43.81 v60.96,43.81 | v60.96,68.58 CPU.40
A11  (via drill 0.35)
  Top 0.152: v76.36,8.89 77.63,10.16 77.63,12.7 85.25,20.32 85.25,29.37 OUT2.9 | CPU.1 8.26,66.67 v8.26,59.85 | 54.93,66.04 54.93,71.44 SRAM.23 57.63,74.14 57.63,79.06 57.31,79.38 57.31,85.25 OUT1.9 | 54.93,66.04 54.93,53.02 ROM.23 v55.88,42.55 | v34.13,69.85 34.45,69.53 v34.45,66.04 | 54.93,66.04 v55.24,66.04 | v64.14,34.29 64.45,34.61 64.45,42.23 v64.14,42.55
  Bottom 0.152: OUT3.9 31.91,1.11 68.58,1.11 v76.36,8.89 | v8.26,59.85 7.94,59.53 3.65,59.53 OUT4.9 | CPU.1 11.11,69.53 21.75,69.53 22.07,69.85 v34.13,69.85 | v55.24,66.04 v34.45,66.04 | OUT2.9 84.93,31.91 83.5,31.91 83.03,32.38 72.55,32.38 71.28,33.66 64.77,33.66 v64.14,34.29 | v55.88,42.55 v64.14,42.55
A12  (via drill 0.35)
  Top 0.152: v16.99,4.45 16.99,20.48 15.24,22.23 15.24,36.35 v15.56,36.67 | v74.3,29.05 73.66,28.42 v73.66,26.99 | v46.04,26.67 44.77,27.94 44.77,35.88 ROM.2 45.4,37.15 45.4,50.32 44.77,50.96 44.77,56.2 SRAM.2 45.72,64.45 v46.04,64.77 | v64.45,85.25 64.61,85.09 64.61,80.8 63.02,79.22 63.02,74.3 63.34,73.98 64.45,73.98 64.45,68.58 62.55,66.67 v62.55,65.41
  Bottom 0.152: OUT4.7 2.38,61.12 1.43,61.12 1.43,63.82 2.54,64.93 9.05,64.93 CPU.2 11.43,64.77 v46.04,64.77 61.91,64.77 v62.55,65.41 | OUT3.7 26.83,1.43 20,1.43 v16.99,4.45 | v15.56,36.67 15.72,36.83 41.12,36.83 42.7,38.42 44.13,38.42 ROM.2 | OUT2.7 85.25,29.05 v74.3,29.05 | v73.66,26.99 46.35,26.99 v46.04,26.67 | OUT1.7 62.07,85.25 v64.45,85.25
A13  (via drill 0.35)
  Top 0.152: v62.07,74.3 62.39,74.61 62.39,84.77 63.5,85.88 OUT1.5 | LOGIC2.13 31.43,41.91 v31.43,43.81 | v18.1,63.18 18.1,62.23 19.21,61.12 19.21,44.93 v19.37,44.77 18.73,44.13 18.73,26.99 | OUT3.5 23.97,1.11 19.21,1.11 19.21,7.3 21.91,10 21.91,21.91 18.73,25.08 18.73,26.99 | 18.73,26.99 v19.05,26.99 | SRAM.26 48.9,71.75 v48.9,62.87
  Bottom 0.152: SRAM.26 50.16,74.3 v62.07,74.3 | v31.43,43.81 30.48,44.77 v19.37,44.77 | v18.1,63.18 17.78,63.5 CPU.3 9.05,64.61 3.65,64.61 3.02,63.98 | OUT2.5 84.93,26.83 75.41,26.83 74.61,27.62 71.28,27.62 70.96,27.3 32.23,27.3 31.91,26.99 v19.05,26.99 | v48.9,62.87 35.56,62.87 34.61,61.91 32.07,61.91 31.75,62.23 4.76,62.23 3.02,63.98 | 3.02,63.98 OUT4.5
A14  (via drill 0.35)
  Top 0.152: OUT3.3 21.75,3.65 21.75,6.03 22.54,6.83 22.54,60.64 v22.23,60.96 | LOGIC2.10 31.27,45.72 v31.27,49.85 31.27,50.96 29.84,52.39 v29.84,56.52 28.57,57.78 28.57,61.59 v31.43,61.59 | v81.76,48.9 v81.76,24.77 | OUT1.3 67.15,85.25 67.15,68.74 66.83,68.42 v66.83,65.41 | v69.85,49.05 v69.85,64.14
  Bottom 0.152: OUT4.3 1.11,66.04 1.11,60.96 2.22,59.85 5.4,59.85 6.03,60.48 9.68,60.48 CPU.4 v22.23,60.96 23.18,61.91 31.11,61.91 v31.43,61.59 | v29.84,56.52 30.48,57.15 SRAM.1 | OUT2.3 84.93,24.29 82.23,24.29 v81.76,24.77 | 69.85,48.9 61.91,48.9 61.59,48.58 41.91,48.58 41.27,49.21 31.91,49.21 v31.27,49.85 | 69.85,48.9 v81.76,48.9 | v66.83,65.41 68.1,64.14 v69.85,64.14 | 69.85,48.9 v69.85,49.05
A15  (via drill 0.35)
  Top 0.152: CPU.5 8.1,58.42 8.1,59.05 6.83,60.33 v6.83,66.67 | OUT1.1 67.47,85.25 v67.47,68.1 | 28.26,26.67 28.1,26.67 28.1,33.97 | 28.26,26.67 LOGI3.9 | 28.1,33.97 28.1,39.37 27.94,39.53 27.94,45.4 29.53,46.99 LOGIC2.9 | v29.05,5.87 28.26,6.67 v28.26,13.34 28.26,26.67 | v22.86,65.72 22.86,34.29 23.18,33.97 28.1,33.97
  Bottom 0.152: 6.19,67.31 6.03,67.47 4.13,67.47 3.02,68.58 OUT4.1 | 6.19,67.31 v6.83,66.67 | v67.47,68.1 67.31,67.94 26.83,67.94 26.19,67.31 22.86,67.31 | 6.19,67.31 22.86,67.31 | OUT3.1 21.75,3.97 28.26,3.97 29.05,4.76 v29.05,5.87 | OUT2.1 79.38,13.34 58.9,13.34 58.58,13.65 28.57,13.65 v28.26,13.34 | v22.86,65.72 22.86,67.31
CLK  (via drill 0.35)
  Top 0.152: v39.05,18.73 39.05,24.13 LOGI3.4 36.04,24.13 36.04,23.97 v34.45,23.97 | OUT3.2 22.23,6.99 22.23,23.5 v21.91,23.81 | CPU.6 6.19,59.85 6.19,67.31 | 6.19,67.31 6.19,67.47 OUT4.2 | OUT1.2 72.39,83.82 72.39,64.14 | 72.39,64.14 72.39,40.48 72.23,40.32 72.23,29.05 72.39,28.89 v72.39,18.73 | 6.19,67.31 7.62,67.31 v7.62,66.04 | 72.39,64.14 v72.07,64.14
  Bottom 0.152: v39.05,18.73 39.37,19.05 48.26,19.05 49.53,17.78 | 49.53,17.78 COMMS.4 53.02,18.73 v72.39,18.73 72.71,19.05 82.55,19.05 OUT2.2 | 49.53,17.78 COMMS.3 | v21.91,23.81 22.07,23.97 v34.45,23.97 | v7.62,66.04 8.57,66.99 20.64,66.99 22.54,65.09 45.4,65.09 45.72,65.41 61.59,65.41 62.23,66.04 66.99,66.04 67.63,66.67 69.53,66.67 v72.07,64.14
D0  (via drill 0.35)
  Top 0.152: SRAM.11 69.53,56.2 69.53,49.69 68.58,48.74 ROM.11 | OUT3.14 34.13,3.65 31.91,3.65 31.91,6.67 33.02,7.78 v33.02,36.2 | v6.83,52.55 7.62,51.75 v7.62,42.23 | v8.89,41.75 8.57,41.43 8.57,37.15 CPU.14 | OUT1.14 54.13,83.03 54.13,73.66 54.29,73.5 54.29,59.21 v53.98,58.9
  Bottom 0.152: 49.85,33.34 51.75,35.24 66.99,35.24 | 49.85,33.34 COMMS.22 | ROM.11 66.99,35.24 | CPU.14 10.64,36.04 23.81,36.04 24.29,36.51 33.02,36.51 | 33.02,36.51 41.43,36.51 44.61,33.34 49.85,33.34 | 33.02,36.51 v33.02,36.2 | OUT2.14 76.99,35.56 76.68,35.24 66.99,35.24 | OUT4.14 5.87,52.55 v6.83,52.55 | v7.62,42.23 8.1,41.75 v8.89,41.75 | v53.98,58.9 54.13,58.74 66.99,58.74 SRAM.11
D1  (via drill 0.35)
  Top 0.152: 71.44,56.83 72.07,56.2 72.07,40.64 71.12,39.69 ROM.12 70.48,36.2 v70.48,34.61 | v69.85,82.39 72.07,80.17 72.07,65.09 71.44,64.45 71.44,56.83 | 71.44,56.83 SRAM.12 | v16.35,7.14 12.06,11.43 12.06,23.02 11.59,23.5 | 11.59,23.5 10.64,24.45 8.57,24.45 8.57,31.43 CPU.15 | v12.7,49.53 12.54,49.37 12.54,24.45 11.59,23.5
  Bottom 0.152: ROM.12 72.71,38.42 83.5,38.42 OUT2.16 | OUT1.16 52.23,82.39 v69.85,82.39 | CPU.15 23.34,33.02 24.29,32.07 25.88,32.07 27.78,30.16 49.21,30.16 COMMS.21 50.8,32.54 53.18,34.92 70.17,34.92 v70.48,34.61 | OUT3.16 36.04,7.14 v16.35,7.14 | OUT4.16 6.35,49.53 v12.7,49.53
D2  (via drill 0.35)
  Top 0.152: ROM.13 v73.66,40.64 73.66,50.01 74.61,50.96 74.61,56.2 SRAM.13 | v7.62,41.12 6.19,42.55 6.19,47.15 OUT4.18 | COMMS.20 54.29,32.7 54.29,39.53 v53.98,39.85 | v40.64,40.64 OUT3.18 | OUT1.18 50.01,82.07 50.01,73.66 49.85,73.5 49.85,58.74 49.53,58.42 49.53,46.51 50.16,45.88 v50.16,40.01
  Bottom 0.152: v7.62,41.12 9.68,41.12 CPU.12 23.34,40.64 24.29,41.59 31.43,41.59 32.38,40.64 v40.64,40.64 41.27,40.01 v50.16,40.01 54.13,40.01 | 54.13,40.01 54.77,40.64 v73.66,40.64 OUT2.18 | 54.13,40.01 v53.98,39.85
D3  (via drill 0.35)
  Top 0.152: CPU.8 8.41,49.05 v8.41,47.62 | v57.15,49.21 v57.15,39.37 57.15,33.02 COMMS.19 55.88,23.18 v55.56,22.86 | SRAM.15 75.25,71.44 75.25,53.02 ROM.15 76.2,50.48 v75.56,49.85 v75.56,43.5 | OUT3.20 44.13,6.03 44.13,9.84 42.39,11.59 41.75,11.59 41.75,13.49 42.55,14.29 42.55,15.08 42.23,15.4 v42.23,20.95 | v26.19,52.07 26.99,51.28 26.99,45.24 25.88,44.13 24.29,44.13 23.81,43.66 23.81,40.16 v24.61,39.37
  Bottom 0.152: v8.41,47.62 6.51,45.72 OUT4.20 | v57.15,49.21 58.1,50.16 75.25,50.16 v75.56,49.85 | v42.23,20.95 44.13,22.86 v55.56,22.86 | OUT2.20 83.5,43.5 v75.56,43.5 | OUT1.20 46.83,84.93 53.66,84.93 54.77,83.82 54.77,82.71 69.22,82.71 69.53,83.03 73.66,83.03 77.47,79.22 77.47,73.82 77.95,73.82 78.42,73.34 78.42,72.39 SRAM.15 | CPU.8 11.43,52.07 v26.19,52.07 | v24.61,39.37 24.92,39.05 29.05,39.05 29.37,38.73 53.5,38.73 53.98,39.21 56.99,39.21 v57.15,39.37
D4  (via drill 0.35)
  Top 0.152: v56.52,6.35 57.15,6.99 57.15,17.3 56.52,17.94 56.52,29.84 COMMS.18 60.01,33.34 v60.01,39.37 | CPU.7 7.3,53.34 7.14,53.5 6.19,53.5 6.19,50.48 5.08,49.37 3.97,49.37 3.97,44.29 OUT4.22 | 73.34,52.39 72.71,53.02 72.71,71.44 73.03,71.75 | OUT1.22 45.56,81.44 v45.56,80.33 | 73.03,71.75 v73.03,80.33 | 73.03,71.75 SRAM.16 | 73.34,52.39 73.34,46.51 v73.03,46.2 73.03,40.16 v72.87,40.01 | 73.34,52.39 ROM.16 | v12.7,78.42 v12.7,53.82
  Bottom 0.152: v56.52,6.35 56.36,6.19 46.83,6.19 OUT3.22 | v45.56,80.33 45.72,80.49 69.85,80.49 70.01,80.33 v73.03,80.33 | OUT2.22 83.34,46.2 v73.03,46.2 | CPU.7 10.64,53.82 v12.7,53.82 | v12.7,78.42 15.4,81.12 26.83,81.12 28.1,82.39 41.75,82.39 OUT1.22 | v60.01,39.37 60.64,40.01 v72.87,40.01
D5  (via drill 0.35)
  Top 0.152: v43.81,80.64 OUT1.24 | v70.33,80.96 71.12,80.17 SRAM.17 71.12,64.45 70.17,63.5 70.17,53.02 ROM.17 v71.12,48.26 | CPU.9 8.89,46.99 8.26,46.99 v8.26,43.81 | COMMS.17 61.91,32.7 61.91,47.31 v62.23,47.62 | v41.59,7.46 40.96,8.1 40.96,40.01 41.27,40.32 v41.27,48.26
  Bottom 0.152: v43.81,80.64 44.13,80.96 v70.33,80.96 | OUT4.24 v8.26,43.81 | 62.87,48.26 v62.23,47.62 | OUT2.24 v71.12,48.26 62.87,48.26 | OUT3.24 47.47,4.29 46.35,4.29 46.04,3.97 42.86,3.97 41.75,5.08 41.75,7.46 v41.59,7.46 | 62.87,48.26 v41.27,48.26 32.38,48.26 31.43,49.21 24.29,49.21 23.34,48.26 CPU.9
D6  (via drill 0.35)
  Top 0.152: COMMS.16 64.14,32.38 64.14,33.34 64.77,33.97 v64.77,49.53 | v52.39,4.13 52.23,4.29 52.23,20.32 52.7,20.8 52.7,28.26 v54.45,30 | v4.29,41.75 3.97,41.43 3.97,39.21 OUT4.26 | SRAM.18 v68.58,69.22 68.58,66.2 67.31,64.93 67.31,53.34 ROM.18 68.58,49.69 v68.42,49.53 | OUT1.26 38.26,83.66 v38.26,69.22 | CPU.10 12.06,47.62 v12.06,67.94
  Bottom 0.152: v64.77,49.53 64.93,49.69 68.42,49.69 | 68.42,49.69 74.77,49.69 75.25,49.21 81.12,49.21 82.71,50.8 OUT2.26 | OUT3.26 51.75,4.13 v52.39,4.13 | v54.45,30 54.61,30.16 61.91,30.16 COMMS.16 | CPU.10 9.53,45.09 8.41,45.09 5.08,41.75 v4.29,41.75 | v68.58,69.22 60.64,69.22 60.33,68.9 38.58,68.9 v38.26,69.22 33.81,69.22 33.5,69.53 24.29,69.53 23.97,69.22 13.34,69.22 v12.06,67.94 | v68.42,49.53 68.42,49.69
D7  (via drill 0.35)
  Top 0.152: COMMS.15 65.41,32.38 65.41,35.4 65.09,35.72 65.09,48.9 66.04,49.85 ROM.19 65.09,53.02 65.09,71.44 SRAM.19 | OUT3.28 54.29,6.03 v54.29,28.57 | OUT1.28 36.35,83.03 v36.35,80.96 | v37.62,70.01 v37.62,79.69
  Bottom 0.152: CPU.13 9.05,39.21 2.22,39.21 1.43,38.42 1.43,34.45 | 1.43,34.45 3.49,34.45 4.6,35.56 OUT4.28 | 54.93,29.21 55.56,29.84 64.14,29.84 COMMS.15 | 54.93,29.21 v54.29,28.57 | v37.62,79.69 v36.35,80.96 | v37.62,70.01 37.78,69.85 38.58,69.85 39.21,69.22 59.85,69.22 62.55,71.91 62.55,73.82 62.87,73.82 63.02,73.98 64.45,73.98 SRAM.19 | OUT2.28 83.5,53.66 67.63,53.66 ROM.19 | 1.43,34.45 1.43,29.53 2.06,29.53 2.54,29.05 11.11,29.05 11.27,28.89 22.54,28.89 22.86,28.57 23.97,28.57 24.61,29.21 54.93,29.21
GND  (via drill 0.35)
  Top 0.152: C6.2 78.74,22.23 77.47,23.5 77.47,35.56 ROM.14 76.2,44.45 77.15,45.4 77.15,56.2 SRAM.14 76.2,63.82 77.15,64.77 77.15,77.15 C1.2 | 46.04,12.7 43.18,15.56 COMMS.1 COMMS.24 | v39.69,32.07 39.69,32.54 38.73,33.5 C7.2 | C9.2 34.45,8.89 v34.45,11.11 34.45,12.7 C8.2 | OUT3.33 59.85,3.65 v59.85,8.89 | v46.04,11.11 46.04,12.7 | 46.04,12.7 LED1.- | RB3.1 35.56,69.06 36.04,68.58 LOGIC1.7 | POWER.1 POWER.2 | 34.45,52.7 34.45,55.24 C3.2 | 35.72,48.58 34.45,49.85 34.45,52.7 | 35.72,48.58 36.04,48.26 LOGIC2.7 35.72,48.58 | 34.45,52.7 C4.2 | LOGI3.7 36.04,27.94 v36.04,32.07 36.04,33.34 34.45,34.92 C5.2 34.29,34.92 34.29,37.15 33.66,37.78 | 33.66,37.78 v31.43,40.01 | 35.72,48.58 33.66,46.51 33.66,41.59 | 33.66,37.78 33.66,41.59 | RB2.1 32.7,72.71 32.7,43.81 32.38,43.5 32.38,42.86 33.66,41.59
  Bottom 0.152: C1.2 73.03,79.38 72.39,80.01 60.33,80.01 C2.2 59.05,80.01 46.2,80.01 45.88,79.69 43.34,79.69 42.7,79.06 42.7,78.11 43.02,77.79 43.02,76.83 42.07,76.83 41.75,77.15 26.83,77.15 26.19,76.52 26.19,72.71 | SRAM.14 76.36,57.31 86.68,57.31 87.47,58.1 87.47,60.96 OUT2.33 | COMMS.23 COMMS.24 40.01,31.75 v39.69,32.07 v36.04,32.07 | v59.85,8.89 52.7,8.89 SV2.1 50.48,11.11 v46.04,11.11 v34.45,11.11 26.83,11.11 26.19,10.48 S1.4 26.04,10.48 19.68,10.48 S1.3 | RB3.1 RB2.1 RB1.1 26.99,72.71 26.19,72.71 | OUT1.33 26.67,85.09 POWER.1 | 26.19,72.71 15.72,72.71 15.24,72.23 14.61,72.23 12.06,74.77 12.06,82.55 POWER.2 | v31.43,40.01 30.8,40.64 CPU.29 25.08,40.32 15.88,40.32 15.08,39.53 1.11,39.53 1.11,29.37 OUT4.33
INT  (via drill 0.35)
  Top 0.152: v23.18,29.21 22.86,28.89 22.86,26.35 | OUT3.4 22.86,26.35 | v17.62,70.17 17.46,70.01 17.46,42.23 17.78,41.91 v17.78,29.53 | R4.2 80.49,27.62 v80.49,24.77 | COMMS.7 v58.42,22.86 58.42,25.24 v57.94,25.72 | OUT1.4 66.52,83.34 v66.52,79.06 | v77.79,73.03 78.9,71.91 R4.2 | R4.2 | v27.15,26.35 22.86,26.35
  Bottom 0.152: CPU.16 11.43,29.21 17.78,29.21 | v23.18,29.21 17.78,29.21 | OUT4.4 3.65,67.47 2.22,67.47 1.43,68.26 1.43,70.17 v17.62,70.17 | 17.78,29.21 v17.78,29.53 | OUT2.4 82.39,22.86 v80.49,24.77 78.58,22.86 v58.42,22.86 | v66.52,79.06 70.01,75.56 75.25,75.56 v77.79,73.03 | v27.15,26.35 28.1,25.4 43.18,25.4 43.5,25.72 v57.94,25.72
IORQ  (via drill 0.35)
  Top 0.152: LOGI3.6 33.34,26.67 33.34,21.27 | 33.34,21.27 33.34,5.4 OUT3.12 | 33.34,21.27 v33.66,21.27 | OUT4.12 8.57,55.88 8.57,55.4 9.68,54.29 11.75,54.29 11.75,47.78 10.64,46.67 8.57,46.67 8.57,45.24 v9.37,44.45 | v17.14,21.27 v17.14,41.59 | v74.3,33.02 73.03,31.75 v73.03,21.91 | v71.75,84.93 77.47,79.22 77.47,74.61 79.53,72.55 v79.53,33.02
  Bottom 0.152: CPU.20 11.11,21.27 v17.14,21.27 v33.66,21.27 34.61,20.32 42.55,20.32 42.86,20.64 44.77,20.64 45.24,20.16 71.28,20.16 v73.03,21.91 | v9.37,44.45 9.68,44.13 14.61,44.13 v17.14,41.59 | v74.3,33.02 v79.53,33.02 OUT2.12 | OUT1.12 56.99,84.93 63.82,84.93 64.14,84.61 65.41,84.61 65.72,84.93 v71.75,84.93
M1  (via drill 0.35)
  Top 0.152: v11.91,34.92 11.75,34.77 v11.75,24.61 | OUT1.37 21.75,85.25 21.75,79.38 22.07,79.06 22.07,75.56 16.83,70.33 16.83,42.23 16.51,41.91 v16.51,27.62 | v64.29,14.92 64.93,14.29 64.93,3.65 OUT3.37 | OUT2.37 85.25,64.93 85.25,55.24 85.41,55.09 85.41,53.82 85.25,53.66 85.25,33.02 83.82,31.59 83.03,31.59 83.03,31.11 v82.39,30.48 | v61.59,28.57 60.96,27.94 60.96,23.5 | COMMS.8 60.96,23.5 | 60.96,23.5 v60.64,23.5
  Bottom 0.152: CPU.27 25.08,35.24 12.22,35.24 v11.91,34.92 | 8.57,23.97 4.13,23.97 3.02,22.86 OUT4.37 | 8.57,23.97 11.11,23.97 v11.75,24.61 13.49,24.61 v16.51,27.62 | COMMS.8 62.55,14.92 v64.29,14.92 | v82.39,30.48 83.03,31.11 83.03,31.91 82.87,31.91 82.71,32.07 73.5,32.07 70.01,28.57 v61.59,28.57 | 8.57,23.97 8.57,21.91 42.7,21.91 44.29,23.5 v60.64,23.5
MREQ  (via drill 0.35)
  Top 0.152: CPU.19 11.75,21.27 11.75,10.79 v16.35,6.19 | LOGIC2.4 35.56,44.45 34.77,43.66 34.77,41.91 LOGIC2.2 36.99,41.91 37.47,42.39 | LOGIC1.1 34.77,60.96 34.77,62.55 | 34.77,62.55 34.77,62.71 34.92,62.87 38.42,62.87 v38.42,60.17 38.42,58.42 37.47,57.47 37.47,53.02 38.73,51.75 38.73,43.66 37.47,42.39 | 34.77,62.55 v34.29,62.55 | OUT1.6 62.71,83.03 62.71,73.66 61.91,72.87 61.91,61.44 v60.64,60.17 | v37.62,24.77 37.47,24.92 37.47,42.39
  Bottom 0.152: v16.35,6.19 23.81,6.19 24.92,5.08 OUT3.6 | OUT2.6 58.58,25.4 57.63,24.45 37.62,24.45 | 37.62,24.45 34.92,24.45 34.77,24.61 26.67,24.61 26.51,24.45 13.81,24.45 12.22,22.86 CPU.19 | OUT4.6 6.03,62.55 v34.29,62.55 | v60.64,60.17 60.48,60.01 38.58,60.01 v38.42,60.17 | v37.62,24.77 37.62,24.45
N$1  (via drill 0.35)
  Top 0.152: v36.2,59.53 R1.2 | v67.94,59.53 69.22,60.8 69.22,70.96 69.85,71.6 X1.2
  Bottom 0.152: v67.94,59.53 v36.2,59.53 | C1.1 73.66,78.11 X1.2
N$2  (via drill 0.35)
  Top 0.152: v32.07,18.26 32.07,16.83 31.75,16.51 R2.1 | 36.04,19.53 v35.24,18.73 | 36.04,19.53 36.04,20.32 LOGI3.1 | 36.04,19.53 38.42,17.14 39.69,17.14 v39.69,28.26 | v67.94,29.53 67.63,29.84 v67.63,39.37 | v63.82,39.37 63.5,39.69 63.5,44.77 64.14,45.4 64.14,50.64 64.77,51.28 X1.1
  Bottom 0.152: v32.07,18.26 32.54,18.73 v35.24,18.73 | C2.1 60.17,77.31 63.98,77.31 X1.1 | v39.69,28.26 40.01,27.94 60.01,27.94 61.59,29.53 v67.94,29.53 | v63.82,39.37 v67.63,39.37
N$3  (via drill 0.35)
  Top 0.152: 34.61,18.1 34.61,21.43 35.4,22.23 | 34.61,18.1 34.61,16.67 R2.2 | 35.4,22.23 36.04,22.86 LOGI3.3 | v30.8,59.37 30.8,58.58 R1.1 | v18.57,59.37 18.1,58.9 18.1,30.16 18.41,29.84 18.41,21.27 v21.27,18.41 | 34.61,18.1 v34.45,18.1 | 35.4,22.23 36.04,21.59 LOGI3.2
  Bottom 0.152: v18.57,59.37 v30.8,59.37 | v21.27,18.41 22.07,17.62 33.97,17.62 v34.45,18.1
N$4  (via drill 0.35)
  Top 0.152: v15.88,32.38 16.19,32.7 16.19,67.31 16.51,67.63 16.51,71.6 20.32,75.41 JP1.1
  Bottom 0.152: CPU.25 23.5,32.38 v15.88,32.38
N$5  (via drill 0.35)
  Top 0.152: v21.91,26.35 21.27,26.99 v21.27,37.47 | v15.56,39.05 15.56,55.4 14.92,56.04 v14.92,72.87
  Bottom 0.152: CPU.23 24.45,26.35 v21.91,26.35 | v21.27,37.47 19.68,39.05 v15.56,39.05 | v14.92,72.87 17.3,75.25 23.18,75.25 JP2.1
N$6  (via drill 0.35)
  Top 0.152: v19.37,41.59 v19.37,28.26 | v26.83,44.13 27.3,44.61 v27.3,54.93 | v39.37,55.24 40.01,55.88 40.01,57.63 39.69,57.94 39.69,69.69 39.85,69.85 39.85,74.14 39.69,74.3 39.69,75.25 JP3.1
  Bottom 0.152: CPU.17 10.48,28.26 v19.37,28.26 | v19.37,41.59 21.91,44.13 v26.83,44.13 | v27.3,54.93 27.62,55.24 v39.37,55.24
N$7  (via drill 0.35)
  Top 0.152: v42.23,28.57 42.23,39.85 42.86,40.48 v42.86,44.45 | v74.93,73.18 v74.93,44.77
  Bottom 0.152: CPU.24 26.35,28.89 41.91,28.89 v42.23,28.57 | v42.86,44.45 53.5,44.45 53.82,44.77 v74.93,44.77 | v74.93,73.18 72.87,75.25 50.96,75.25 50.01,76.2 50.01,77.15 45.4,77.15 JP4.1
N$8  (via drill 0.35)
  Top 0.152: v37.78,63.5 LOGIC1.3 | v59.05,61.44 59.37,61.12 59.37,54.77 58.42,53.82 ROM.22
  Bottom 0.152: v37.78,63.5 56.99,63.5 v59.05,61.44
N$9  (via drill 0.35)
  Top 0.152: LOGIC2.11 31.59,44.45 v31.59,44.77 | ROM.20 v63.5,45.72
  Bottom 0.152: v31.59,44.77 32.54,45.72 v63.5,45.72
N$10  (via drill 0.35)
  Top 0.152: LOGIC2.12 28.57,43.18 v28.57,39.85 | v27.3,40.01 27.62,40.32 27.62,46.35 29.53,48.26 LOGIC2.8
  Bottom 0.152: v28.57,39.85 28.42,40.01 v27.3,40.01
N$11  (via drill 0.35)
  Top 0.152: v74.93,39.69 74.93,27.15 R5.1 | v76.83,40.01 77.63,40.8 77.63,44.45 78.11,44.93 v78.11,65.88 | v69.22,74.61 68.1,75.72 v68.1,75.88
  Bottom 0.152: v74.93,39.69 75.25,40.01 v76.83,40.01 | v78.11,65.88 72.07,71.91 72.07,74.61 v69.22,74.61 | v68.1,75.88 67.94,75.72 58.42,75.72 56.67,77.47 49.53,77.47 JP5.2
N$12  (via drill 0.35)
  Top 0.152: LOGI3.5 34.61,25.4 v34.61,26.04 | v67.94,26.35 68.58,26.99 COMMS.14
  Bottom 0.152: v34.61,26.04 57.31,26.04 57.63,26.35 v67.94,26.35
N$13  (via drill 0.35)
  Top 0.152: v39.05,58.9 39.05,56.99 R6.1 | v51.44,58.9 51.44,70.96 52.07,71.6 JP6.1
  Bottom 0.152: v39.05,58.9 39.37,59.21 51.12,59.21 v51.44,58.9
N$14  (via drill 0.35)
  Top 0.152: v80.64,23.65 81.12,24.13 81.12,54.77 81.92,55.56 v81.92,60.17 | v47.62,64.14 46.67,65.09 v46.67,70.96
  Bottom 0.152: COMMS.6 57.47,18.1 83.03,18.1 84.93,20 84.93,21.75 82.55,21.75 v80.64,23.65 | v81.92,60.17 79.22,62.87 58.9,62.87 57.63,64.14 v47.62,64.14 | v46.67,70.96 46.67,76.2 JP5.1
N$15  (via drill 0.35)
  Top 0.152: v39.37,42.55 39.37,53.18 R6.2 | v43.81,41.27 44.13,40.96 44.13,25.4 v43.81,25.08 | v57.15,25.08 57.47,24.77 57.47,11.75 SV2.4
  Bottom 0.152: v39.37,42.55 40.64,41.27 v43.81,41.27 | v57.15,25.08 v43.81,25.08
N$16  (via drill 0.35)
  Top 0.152: v78.11,24.45 78.11,25.4 78.74,26.04 R5.2 | v61.59,23.5 61.91,23.18 61.91,11.75 SV2.5
  Bottom 0.152: v78.11,24.45 77.15,23.5 v61.59,23.5
N$17  (via drill 0.35)
  Top 0.152: v47.62,18.41 48.58,19.37 v48.58,28.57 | v49.85,28.57 49.53,28.89 49.53,46.04 48.9,46.67 v48.9,49.21 | v59.21,53.66 59.69,54.13 59.69,74.45 61.59,76.36 61.59,77.79 v61.44,77.95
  Bottom 0.152: v47.62,18.41 COMMS.2 | v49.85,28.57 v48.58,28.57 | v48.9,49.21 50.16,50.48 56.36,50.48 57.47,51.59 57.47,53.66 v59.21,53.66 | v61.44,77.95 57.15,77.95 56.99,77.79 53.02,77.79 JP6.2
N$18  (via drill 0.35)
  Top 0.152: v75.41,20.64 75.41,19.68 R9.1 | COMMS.5 v53.34,22.23
  Bottom 0.152: v75.41,20.64 73.5,22.54 59.05,22.54 58.74,22.23 v53.34,22.23
N$19
  Top 0.152: SV2.3 54.93,11.75 54.93,29.53 55.09,29.69 55.09,30.48 54.61,30.96 54.61,74.93 JP7.1
N$20  (via drill 0.35)
  Top 0.152: v72.07,12.38 78.74,19.05 R9.2
  Bottom 0.152: v72.07,12.38 68.9,9.21 60.48,9.21 60.17,9.53 59.21,9.53 58.9,9.21 54.93,9.21 SV2.2
N$21  (via drill 0.35)
  Top 0.152: v29.53,39.53 29.53,28.26 29.84,27.94 LOGI3.8 | v51.44,39.37 52.7,40.64 v52.7,43.18 | v76.83,44.13 77.47,44.77 v77.47,64.14
  Bottom 0.152: v29.53,39.53 29.69,39.37 v51.44,39.37 | v52.7,43.18 53.98,44.45 74.3,44.45 74.61,44.13 v76.83,44.13 | v77.47,64.14 70.8,70.8 65.09,70.8 SRAM.20
N$22  (via drill 0.35)
  Top 0.152: LOGIC2.6 34.77,46.99 34.77,45.24 34.92,45.09 v37.62,45.09 | v51.44,43.81 51.75,44.13 51.75,50.48 52.07,50.8 v52.07,70.17
  Bottom 0.152: v37.62,45.09 38.89,43.81 v51.44,43.81 | v52.07,70.17 52.7,70.8 56.83,70.8 SRAM.22
N$23  (via drill 0.35)
  Top 0.152: LOGIC2.3 37.78,43.18 37.78,44.29 38.26,44.77 38.26,49.69 v38.1,49.85 | v41.27,52.7 41.43,52.86 41.43,57.15 40.32,58.26 40.32,69.37 40.64,69.69 40.64,72.87 v41.75,73.98
  Bottom 0.152: v38.1,49.85 40.96,52.7 v41.27,52.7 | v41.75,73.98 44.13,73.98 SRAM.27
N$26
  Top 0.152: LED1.+ 42.86,12.7 45.72,9.84 45.72,8.89 R8.2
RD  (via drill 0.35)
  Top 0.152: v28.89,18.26 30.16,16.99 30.16,5.4 OUT3.10 | OUT2.10 82.39,29.05 82.39,24.45 v80.33,22.38 | LOGIC2.5 37.47,45.72 37.47,52.55 37.15,52.86 37.15,60.17 | 37.15,60.17 37.15,60.33 37.47,60.64 37.47,61.28 | 37.47,61.28 36.51,62.23 LOGIC1.2 | 37.15,60.17 v37.47,60.17 | OUT1.10 57.94,83.34 v57.94,81.76 | v46.51,81.6 46.2,81.28 46.2,74.93 44.13,72.87 v44.13,62.23 44.13,51.12 45.09,50.16 45.09,44.61 44.45,43.97 v44.45,20 | 37.47,61.28 v37.78,61.59
  Bottom 0.152: CPU.21 27.46,18.26 v28.89,18.26 30,19.37 44.45,19.37 | v80.33,22.38 77.31,19.37 44.45,19.37 | OUT4.10 5.87,59.21 8.89,59.21 9.37,59.69 17.94,59.69 18.26,60.01 35.72,60.01 35.88,60.17 v37.47,60.17 | v57.94,81.76 57.78,81.6 v46.51,81.6 | v44.13,62.23 43.5,61.59 v37.78,61.59 | v44.45,20 44.45,19.37
RESET  (via drill 0.35)
  Top 0.152: v17.62,17.94 19.53,16.03 19.53,15.08 S1.1 | v30.16,32.38 R3.1 | OUT3.39 70.48,4.45 v70.48,13.97 | CPU.26 27.78,30.64 27.78,16.67 26.19,15.08 S1.2 | v81.28,64.93 80.17,63.82 v80.17,34.92
  Bottom 0.152: OUT1.39 21.75,87.79 76.52,87.79 87,77.31 87,68.58 OUT2.39 84.93,67.15 83.5,67.15 v81.28,64.93 | OUT4.39 4.92,17.94 v17.62,17.94 | v30.16,32.38 29.53,33.02 CPU.26 | S1.1 19.68,14.92 26.04,14.92 S1.2 26.19,14.92 27.15,13.97 v70.48,13.97 79.38,13.97 85.09,19.68 85.25,19.68 85.25,20.64 86.04,21.43 87.47,21.43 87.47,33.34 86.36,34.45 80.64,34.45 v80.17,34.92
RX  (via drill 0.35)
  Top 0.152: OUT4.32 8.26,27.3 8.26,17.14 v11.11,14.29 | v42.55,85.09 47.15,85.09 47.15,86.68 48.26,87.79 79.06,87.79 79.06,84.77 84.93,78.9 84.93,59.53 OUT2.32 82.71,57.31 82.71,47.94 83.03,47.62 83.03,46.51 82.71,46.2 82.71,43.18 v82.39,42.86 | v65.56,7.62 69.85,11.91 69.85,40.32 v71.44,41.91
  Bottom 0.152: v11.11,14.29 17.3,8.1 55.72,8.1 58.42,5.4 | OUT1.32 31.59,84.93 36.04,84.93 36.2,84.77 37.62,84.77 37.94,85.09 v42.55,85.09 | 58.42,5.4 60.64,7.62 v65.56,7.62 | v71.44,41.91 71.75,41.59 79.85,41.59 81.12,42.86 v82.39,42.86 | 58.42,5.4 OUT3.32
S1  (via drill 0.35)
  Top 0.152: ROM.26 49.21,53.02 v49.21,61.44 | v45.09,62.23 44.77,62.55 v44.77,70.96
  Bottom 0.152: v49.21,61.44 48.42,62.23 v45.09,62.23 | v44.77,70.96 44.61,70.8 40.48,70.8 36.35,74.93 29.21,74.93 RB1.2
S2  (via drill 0.35)
  Top 0.152: v42.39,50.48 41.91,50.96 v41.91,71.44
  Bottom 0.152: ROM.27 44.13,50.48 v42.39,50.48 | v41.91,71.44 38.1,75.25 32.7,75.25 RB2.2
S3  (via drill 0.35)
  Top 0.152: ROM.1 43.18,43.18 44.77,44.77 44.77,48.9 43.81,49.85 40.64,49.85 40.64,57.47 40.01,58.1 40.01,69.53 40.32,69.85 v40.32,74.61
  Bottom 0.152: v40.32,74.61 39.69,75.25 38.58,75.25 37.62,76.2 RB3.2
SPR1  (via drill 0.35)
  Top 0.152: v58.1,12.7 59.05,13.65 59.05,14.92 59.37,15.24 60.17,15.24 60.17,15.08 60.33,14.92 60.33,12.22 60.01,11.91 60.01,9.68 60.96,8.73 OUT3.34 | OUT2.34 82.39,59.53 v82.39,46.83 | v71.44,46.83 69.53,44.93 69.53,14.29 v67.63,12.38
  Bottom 0.152: OUT1.34 29.37,85.25 29.37,87.47 76.36,87.47 82.71,81.12 82.71,66.83 82.23,66.83 80.64,65.25 80.64,64.29 83.19,64.29 83.5,64.61 84.14,64.61 84.93,63.82 84.93,60.96 OUT2.34 | OUT4.34 3.65,26.51 2.22,26.51 1.11,25.4 1.11,14.92 16.99,14.92 19.53,12.38 57.78,12.38 v58.1,12.7 67.31,12.7 v67.63,12.38 | v71.44,46.83 v82.39,46.83
SPR2  (via drill 0.35)
  Top 0.152: v35.88,16.19 36.67,15.4 36.67,2.54 37.78,1.43 62.39,1.43 62.39,3.97 OUT3.36 | OUT1.36 27.94,81.28 29.69,81.28 29.69,70.01 28.26,68.58 v28.26,54.29 v28.26,51.44 | v14.29,49.53 13.65,48.9 13.65,37.62 13.97,37.31 v13.97,16.19 | v62.87,63.5 62.23,62.87 v62.23,56.36
  Bottom 0.152: OUT4.36 3.65,23.97 2.22,23.97 1.43,23.18 1.43,16.19 v13.97,16.19 v35.88,16.19 | v28.26,51.44 26.35,49.53 v14.29,49.53 | v62.87,63.5 OUT2.36 | v62.23,56.36 61.44,55.56 51.28,55.56 50.01,54.29 41.12,54.29 40.8,53.98 28.57,53.98 v28.26,54.29
SPR3  (via drill 0.35)
  Top 0.152: 3.97,23.97 3.65,24.29 1.11,24.29 1.11,76.04 12.54,87.47 23.97,87.47 23.97,84.93 OUT1.38 | 3.97,23.97 OUT4.38 | v9.21,14.29 3.97,19.53 3.97,23.97
  Bottom 0.152: OUT2.38 84.93,64.93 87.79,64.93 87.79,20.32 80.49,13.02 73.98,13.02 OUT3.38 64.61,3.65 63.18,3.65 62.07,2.54 62.07,1.43 40.32,1.43 39.53,2.22 39.53,7.78 15.72,7.78 v9.21,14.29
SPR4  (via drill 0.35)
  Top 0.152: v23.81,19.05 23.97,18.89 23.97,7.94 26.83,5.08 26.83,2.22 27.94,1.11 67.47,1.11 67.47,1.43 | 67.47,1.43 67.47,3.97 OUT3.40 | OUT1.40 17.94,86.2 11.75,86.2 11.75,79.06 2.38,69.69 1.43,69.69 1.43,35.24 2.54,34.13 3.81,34.13 v3.81,32.38 | v13.18,19.05 v13.18,32.23 | OUT2.40 84.3,69.06 v84.3,71.6 | v86.36,70.01 87.79,68.58 87.79,12.86 76.36,1.43 67.47,1.43
  Bottom 0.152: OUT4.40 6.35,19.05 v13.18,19.05 v23.81,19.05 | v3.81,32.38 4.29,31.91 12.86,31.91 v13.18,32.23 | v84.3,71.6 85.88,70.01 v86.36,70.01
TX  (via drill 0.35)
  Top 0.152: v14.29,80.96 14.29,72.55 14.61,72.23 14.61,52.23 15.24,51.59 15.24,48.1 14.92,47.78 14.92,34.29 v14.61,33.97 14.61,19.05 v16.35,17.3 | OUT3.30 55.88,8.73 56.83,9.68 56.83,13.34 v55.56,14.61 | v81.28,55.88 80.8,56.36 v80.8,60.17 | v46.83,60.64 46.67,60.48 46.67,39.37 46.35,39.05 46.35,38.26 46.67,37.94 v46.67,14.92
  Bottom 0.152: OUT4.30 6.03,33.97 v14.61,33.97 | v14.29,80.96 14.76,81.44 26.67,81.44 27.94,82.71 31.91,82.71 OUT1.30 | v55.56,14.61 55.24,14.92 v46.67,14.92 42.55,14.92 40.16,17.3 v16.35,17.3 | v81.28,55.88 OUT2.30 | v80.8,60.17 80.17,60.8 48.1,60.8 47.94,60.64 v46.83,60.64
WR  (via drill 0.35)
  Top 0.152: COMMS.13 71.75,31.11 v71.75,28.57 | v35.88,35.24 35.88,40.48 36.04,40.64 LOGIC2.1 | v31.43,30.8 31.59,30.64 v31.59,27.62 v31.59,23.34 32.7,22.23 32.7,7.94 31.59,6.83 31.59,3.65 29.37,3.65 OUT3.8 | v20.95,23.81 20,24.77 20,61.28 v19.68,61.59 19.68,67.79 v22.7,70.8 | OUT1.8 62.39,85.25 62.39,86.68 63.18,87.47 64.93,87.47 64.93,85.72 65.09,85.57 65.09,84.3 64.93,84.14 64.93,80.64 63.66,79.38 v63.66,74.61
  Bottom 0.152: OUT2.8 72.39,27.94 v71.75,28.57 70.8,27.62 v31.59,27.62 | v31.43,30.8 v35.88,35.24 | v31.59,23.34 31.11,22.86 CPU.22 21.91,22.86 v20.95,23.81 | OUT4.8 6.03,61.91 19.37,61.91 v19.68,61.59 | v63.66,74.61 63.34,74.93 48.74,74.93 47.31,73.5 47.31,70.33 40.01,70.33 39.53,70.8 v22.7,70.8